# Altium PCB 2.0_LCD_FPC.PcbDoc
Units mil, origin at the board's own origin, x right, y up, seen from the top; angles counter-clockwise.
Board outline 2190 x 1496.06 mil, 2 copper layers (Top Layer, Bottom Layer); 15 components, 23 nets, 85 pads, 94 vias.
Unrouted connection lines stored in the file: 19.
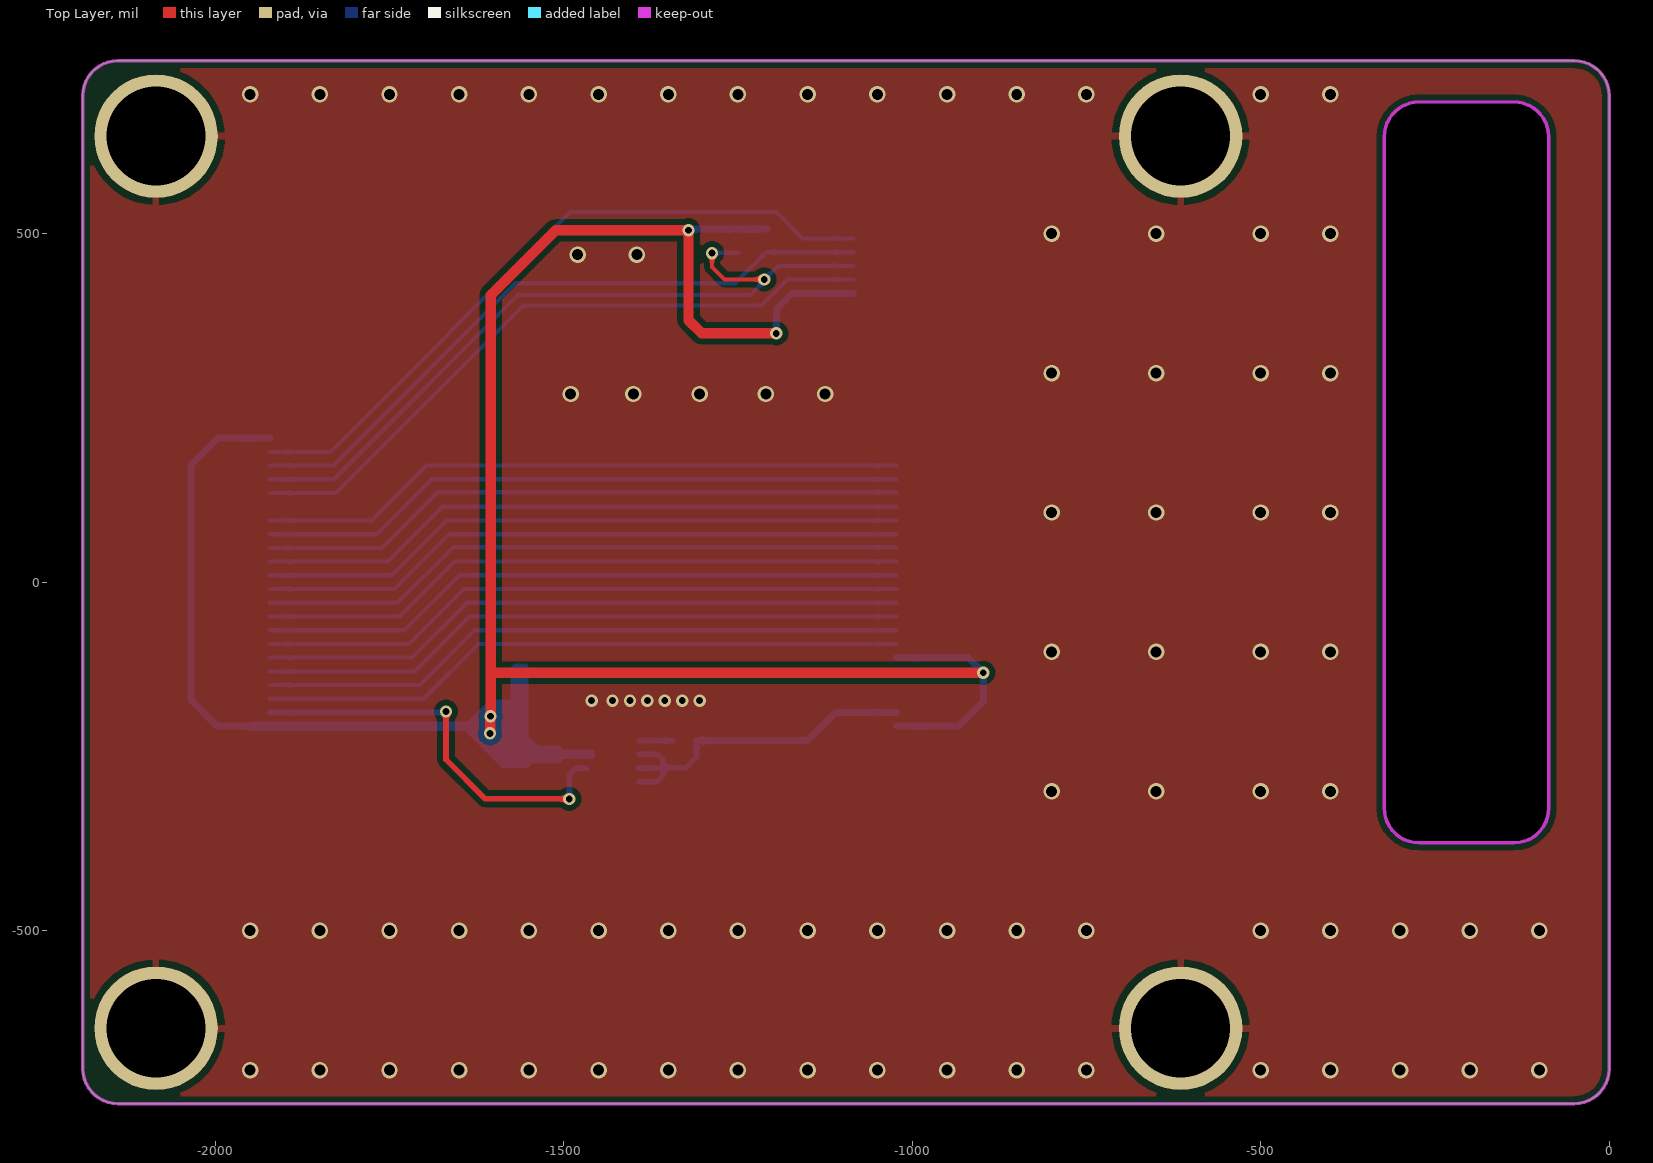
[diagram p0: Top Layer view]
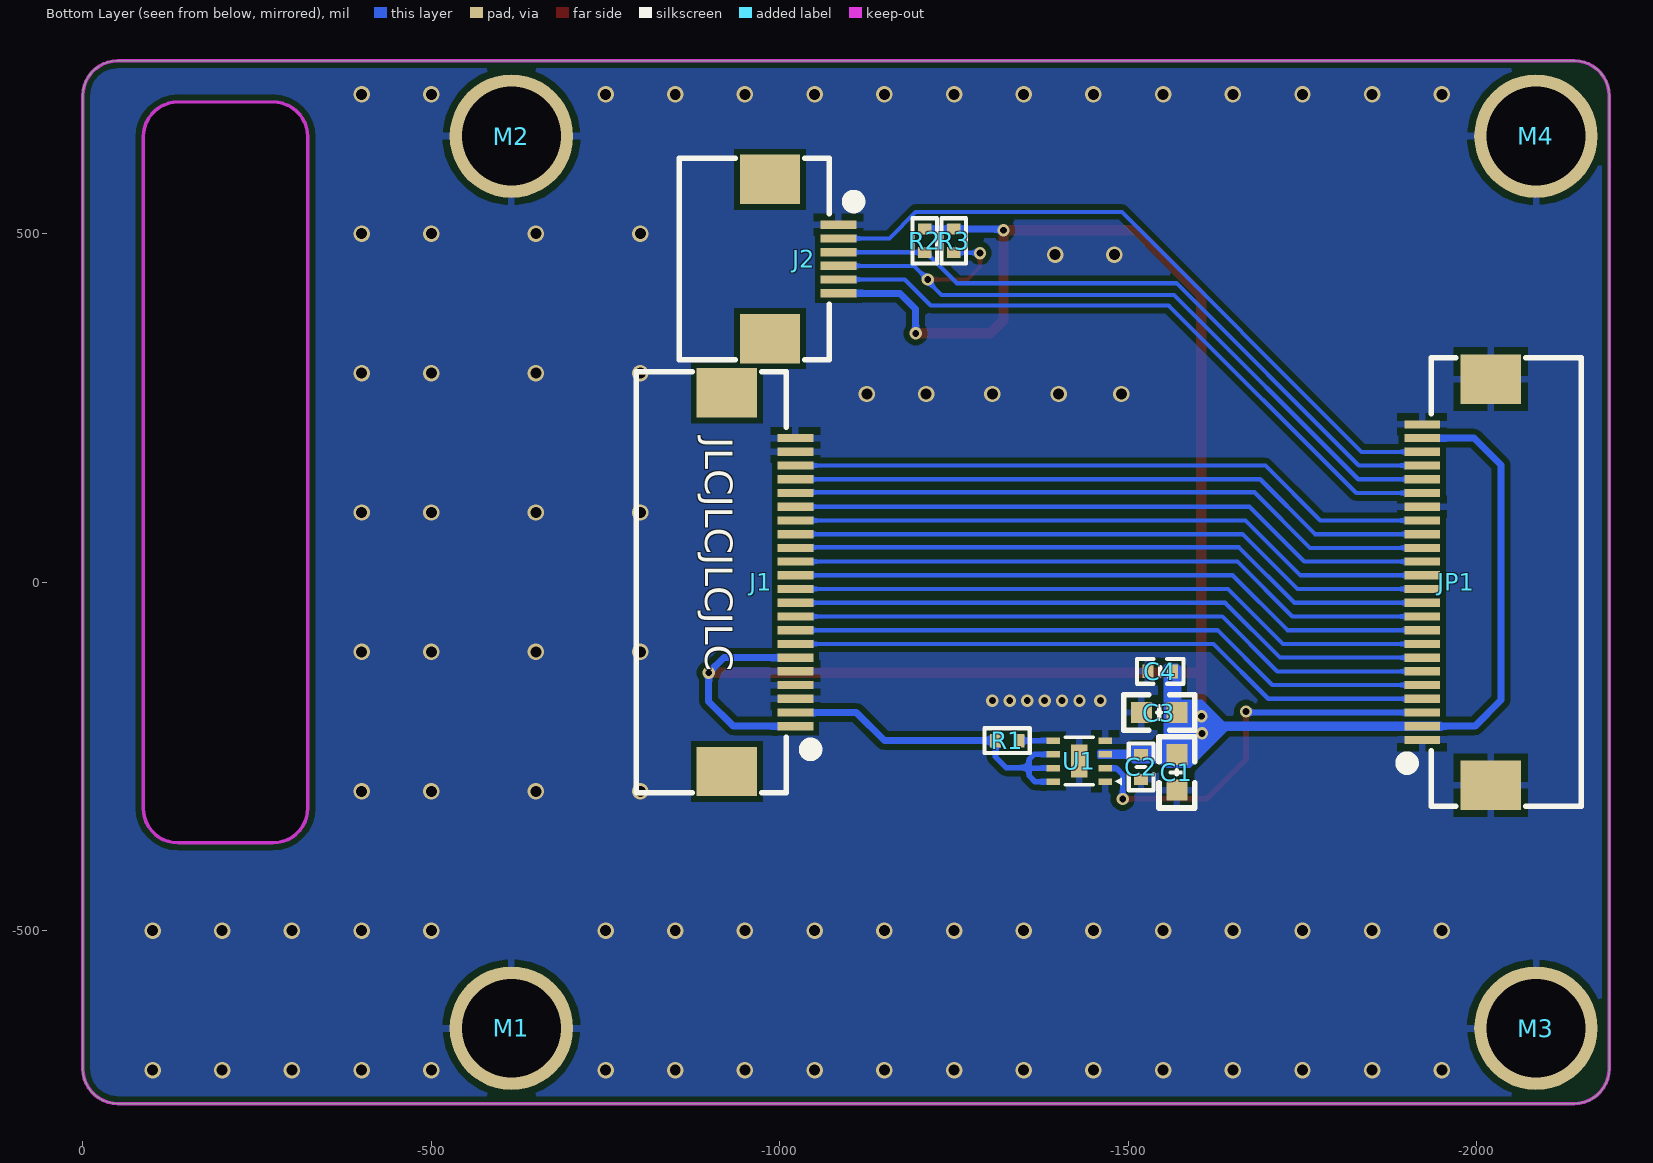
[diagram p1: Bottom Layer view, seen from below]
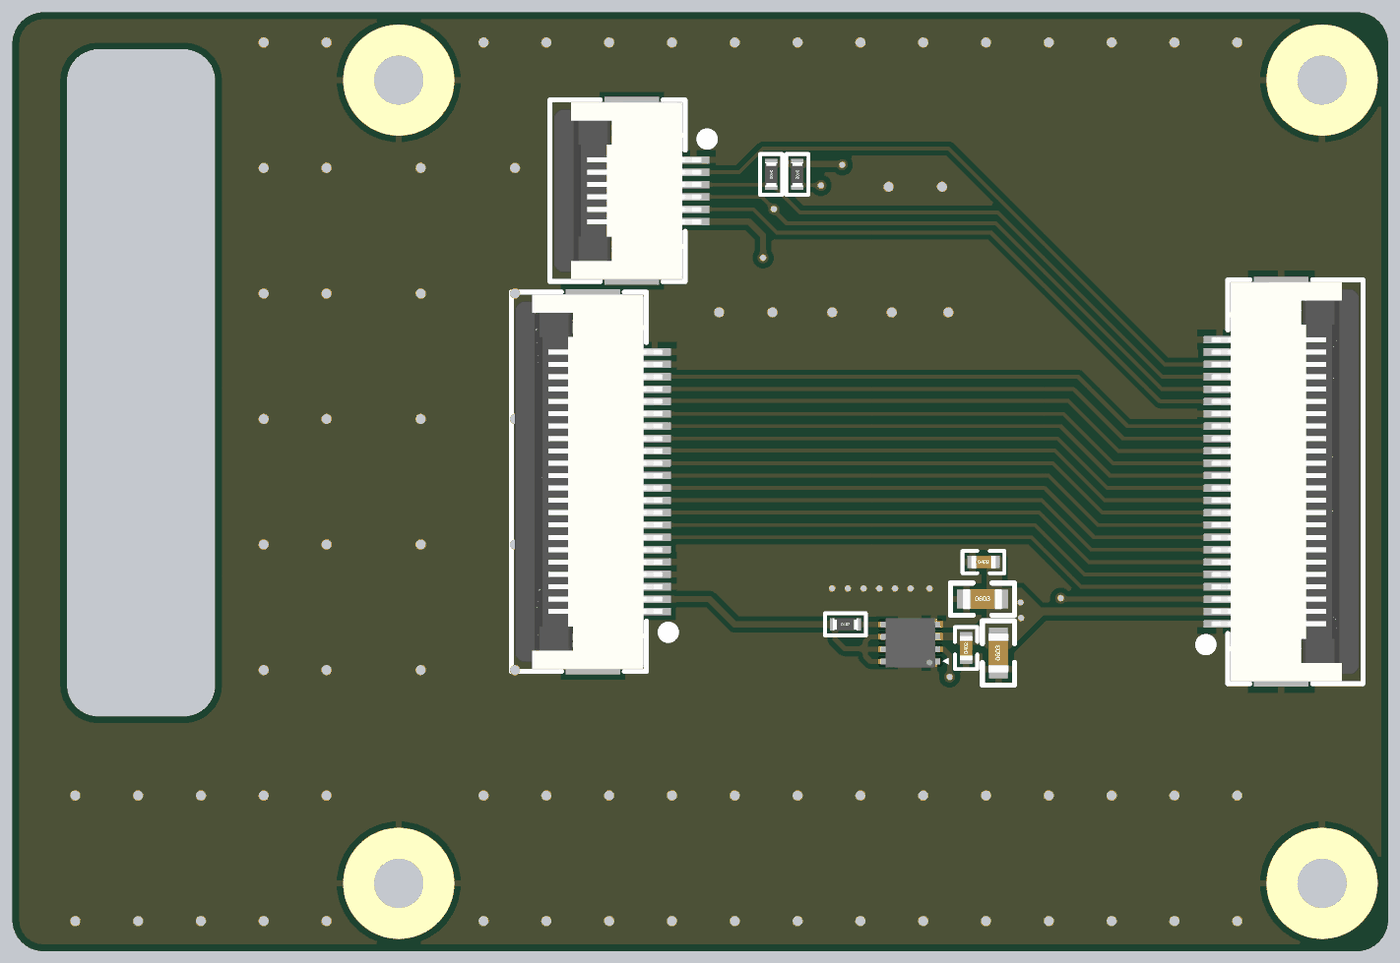
[diagram p2: 3D render of the assembled board from below, using the file's embedded part models]

## Layer stack, top to bottom
Top Solder: solder mask 0.4, Solder Resist, Dk 3.5
Top Layer: signal copper 1.4
Dielectric 1: dielectric 12.6, FR-4, Dk 4.8
Bottom Layer: signal copper 1.4
Bottom Solder: solder mask 0.4, Solder Resist, Dk 3.5

## Board outline
-2190,-698.03 -2190,698.03 cw(c-2140,698.03) -2140,748.03 -50,748.03 cw(c-50,698.03) 0,698.03 0,-698.03 cw(c-50,-698.03) -50,-748.03 -2140,-748.03 cw(c-2140,-698.03)
cut-out: -322.83,-324.02 ccw(c-272.83,-324.02) -272.83,-374.02 -136.61,-374.02 ccw(c-136.61,-324.02) -86.61,-324.02 -86.61,638.98 ccw(c-136.61,638.98) -136.61,688.98 -272.83,688.98 ccw(c-272.83,638.98) -322.83,638.98

## Design rules (kind name [scope] priority, off if disabled: settings)
Clearance Clearance_1 [InPolygon] p1: gap=8 ignorepadtopadclearanceinfootprint=TRUE
Clearance [All] p2: gap=6 ignorepadtopadclearanceinfootprint=FALSE
HoleSize [All] p1: absolutevalues=TRUE maxlimit=500 minlimit=1 maxpercent=80.000 minpercent=20.000
MinimumSolderMaskSliver [All] p1: minsoldermaskwidth=0
PolygonConnect [All] p1: thpad.connectstyle=Relief thpad.reliefconductorwidth=10 thpad.reliefentries=4 thpad.polygonreliefangle="90 Angle" thpad.airgapwidth=10 smdpad.connectstyle=Relief smdpad.reliefconductorwidth=10 smdpad.reliefentries=4 smdpad.polygonreliefangle="90 Angle" smdpad.airgapwidth=10 via.connectstyle=Direct via.reliefconductorwidth=10 via.reliefentries=4 via.polygonreliefangle="90 Angle" via.airgapwidth=10
RoutingVias [All] p1: holewidth=9.84 width=17.72 viastyle="Through Hole" minholewidth=9.84 minwidth=17.72 maxholewidth=23.62 maxwidth=31.5
SilkToSilkClearance [All] p1: silktosilkclearance=0
SilkToSolderMaskClearance [IsPad] p1: minsilkscreentomaskgap=0 clearancetoexposedcopper=TRUE
SolderMaskExpansion [IsVia] p1: expansion=4 istentingtop=TRUE useseparateexpansions=TRUE expansionbottom=4 istentingbottom=TRUE
Width [All] p1: maxlimit=20 minlimit=6 preferedwidth=6
26 further rules are at their usual default settings.

## Components (designator, comment, footprint, x,y, rotation, side; value= is the part's Value field where it differs from the comment)
C1 "4.7uF" C0603_L -1569.66,-272.88 r90 bottom
C2 "0.1uF" C0402_L -1518.29,-265.12 r90 bottom
C3 "4.7uF" C0603_L -1544.41,-187 r180 bottom
C4 "0.1uF" C0402_L -1546,-128 r180 bottom
J1 "0.5mmFPC" FPC0.5-WT-22P -924.14,0 r90 bottom locked
J2 "Touch" FPC0.5-WT-6P -985.88,463.7 r270 bottom locked
JP1 "24Pin" FPC0.5-WT-24P -2020,0 r90 bottom locked
M1 "M2" M2*4.5*2.5*0.8*3.3 -615,-640 r0 bottom
M2 "M2" M2*4.5*2.5*0.8*3.3 -615,640 r0 bottom locked
M3 "M2" M2*4.5*2.5*0.8*3.3 -2085,-640 r0 bottom locked
M4 "M2" M2*4.5*2.5*0.8*3.3 -2085,640 r180 bottom
R1 "NC/0R" R0402_L -1326.21,-227.34 r180 bottom
R2 "4.7K" R0402_L -1208,489.73 r270 bottom
R3 "4.7K" R0402_L -1249.66,489.73 r270 bottom
U1 "AW9364DNR" DFN2X2-8L -1429.6,-256.84 r0 bottom

## Footprints (in the part's own frame and the unit in brackets; to place one, negate y for a bottom-side part, rotate by r counter-clockwise, add the part's x,y. Pads: shape width x height; smd on the part's side, far side on the other; paste and mask are expansions set on the pad)
C0402_L [mm] "无极性贴片电容"
  rect 0.4x0.5 smd: 1(-0.45,0) 2(0.45,0)
  silkscreen extent -0.85,-0.45 0.85,0.45, body extent -0.5,-0.26 0.5,0.26, height 0.54
C0603_L [mil] "无极性贴片电容"
  rect 30x30 smd: 1(-25.59,0) 2(25.59,0)
  silkscreen extent -51,-26 51,26, body extent -31,-16 32,16, height 33
DFN2X2-8L [mm]
  rect 0.5x0.24 smd mask+0.102: 1(-0.95,0.75) 2(-0.95,0.25) 3(-0.95,-0.25) 4(-0.95,-0.75) 5(0.95,-0.75) 6(0.95,-0.25) 7(0.95,0.25) 8(0.95,0.75)
  rect 0.6x1.2 smd mask+0.102: 9(0,0)
  silkscreen extent -1.55,-0.86 0.51,0.88, body extent -1,-1 1,1, height 0.75
FPC0.5-WT-6P [mm] "长：7.2mm，宽：5.2mm，高：2mm               黄晶宝石"
  rect 1.8x2.2 smd: 0(-2.9,0) 0(2.9,0)
  rect 0.3x1.3 smd: 1(-1.25,2.497) 2(-0.75,2.497) 3(-0.25,2.497) 4(0.25,2.497) 5(0.75,2.497) 6(1.25,2.497)
  silkscreen extent -3.67,-3.3 3.67,3.23, body extent -3.6,-3.15 3.6,2.85, height 2
FPC0.5-WT-22P [mm] "长：15.2mm，宽：5.2mm，高：2mm 淘宝ID:黄晶宝石   店铺网址:https://shop463601444.taobao.com"
  rect 1.8x2.2 smd: 0(-6.9,0) 0(6.9,0)
  rect 0.3x1.3 smd: 1(-5.25,-2.497) 2(-4.75,-2.497) 3(-4.25,-2.497) 4(-3.75,-2.497) 5(-3.25,-2.497) 6(-2.75,-2.497) 7(-2.25,-2.497) 8(-1.75,-2.497) 9(-1.25,-2.497) 10(-0.75,-2.497) 11(-0.25,-2.497) 12(0.25,-2.497) 13(0.75,-2.497) 14(1.25,-2.497) 15(1.75,-2.497) 16(2.25,-2.497) 17(2.75,-2.497) 18(3.25,-2.497) 19(3.75,-2.497) 20(4.25,-2.497) 21(4.75,-2.497) 22(5.25,-2.497)
  silkscreen extent -7.68,-3.23 7.68,3.3, body extent -7.6,-2.85 7.6,3.15, height 2
FPC0.5-WT-24P [mm] "长：16.2mm，宽：5.2mm，高：2mm 淘宝ID:黄晶宝石   店铺网址:https://shop463601444.taobao.com"
  rect 1.8x2.2 smd: 0(-7.4,0) 0(7.4,0)
  rect 0.3x1.3 smd: 1(-5.75,2.497) 2(-5.25,2.497) 3(-4.75,2.497) 4(-4.25,2.497) 5(-3.75,2.497) 6(-3.25,2.497) 7(-2.75,2.497) 8(-2.25,2.497) 9(-1.75,2.497) 10(-1.25,2.497) 11(-0.75,2.497) 12(-0.25,2.497) 13(0.25,2.497) 14(0.75,2.497) 15(1.25,2.497) 16(1.75,2.497) 17(2.25,2.497) 18(2.75,2.497) 19(3.25,2.497) 20(3.75,2.497) 21(4.25,2.497) 22(4.75,2.497) 23(5.25,2.497) 24(5.75,2.497)
  silkscreen extent -8.18,-3.3 8.18,3.23, body extent -8.1,-3.15 8.1,2.85, height 2
M2*4.5*2.5*0.8*3.3 [mm] "SMT螺母"
  round 4.5 hole 3.6: 1(0,0)
  body extent -2.25,-2.25 2.25,2.25, height 2.5
R0402_L [mm] "1/16W贴片电阻"
  rect 0.4x0.5 smd: 1(-0.425,0) 2(0.425,0)
  silkscreen extent -0.82,-0.45 0.83,0.45, body extent -0.5,-0.25 0.5,0.25, height 0.3

## Part data
C1 C2 C3 C4: library part C, "贴片电容", BOM名称=无极性贴片电容, 联系卖家，免费查找封装=唯一出售店铺网址https://shop463601444.taobao.com
J1: library part 中景园2.0寸屏幕FPC接口
J2: library part 深圳市大显伟业2.0寸触摸屏
JP1: library part 屏幕板FPC, "屏幕板外接座"
M1 M2 M3 M4: library part M2系列, "M2孔支撑柱"
R1 R2 R3: library part R, "贴片电阻", BOM名称=贴片电阻, 联系卖家，免费查找封装=唯一出售店铺网址https://shop463601444.taobao.com
U1: "并联调光背光驱动"

## Via types
v1: diameter 23.62, hole 15.75, Top Layer to Bottom Layer, tented both sides, 78 vias
v2: diameter 17.72, hole 9.84, Top Layer to Bottom Layer, tented both sides, 16 vias

## Nets (pads, with @x,y where several pads share a name; then routed paths per layer and width w, separated by ;. In a path a pad name is that pad's centre, name@x,y a point inside that pad or via, vN(x,y) a via of type N, cw(c..) or ccw(c..) an arc to the next point about the centre after c; other vN are vias at no path point)
CS: J1.18 JP1.15 | length 932.7
  Bottom Layer w6: JP1.15 -1760.79,49.21 -1681,129 -1023.5,129 J1.18
DB0: J1.14 JP1.11 | length 932.5
  Bottom Layer w6: JP1.11 -1738.52,-29.53 -1658.99,50 -1023.24,50 J1.14
DB1: J1.13 JP1.10 | length 931.9
  Bottom Layer w6: JP1.10 -1735.3,-49.21 -1656.56,29.53 J1.13
DB2: J1.12 JP1.9 | length 931.9
  Bottom Layer w6: JP1.9 -1728.61,-68.9 -1649.87,9.84 J1.12
DB3: J1.11 JP1.8 | length 931.9
  Bottom Layer w6: JP1.8 -1721.91,-88.58 -1643.17,-9.84 J1.11
DB4: J1.10 JP1.7 | length 931.9
  Bottom Layer w6: JP1.7 -1717.79,-108.27 -1639.05,-29.53 J1.10
DB5: J1.9 JP1.6 | length 931.9
  Bottom Layer w6: JP1.6 -1713.71,-127.95 -1634.97,-49.21 J1.9
DB6: J1.8 JP1.5 | length 931.9
  Bottom Layer w6: JP1.5 -1706.63,-147.64 -1627.89,-68.9 J1.8
DB7: J1.7 JP1.4 | length 931.9
  Bottom Layer w6: JP1.4 -1700.89,-167.32 -1622.15,-88.58 J1.7
GND: C1.1 C2.1 C3.1 C4.1 J1.3 J1.4 J1.5 J1.21 J1.22 J2.1 JP1.0 JP1.1 JP1.18 JP1.24 M1.1 M2.1 M3.1 M4.1 U1.1 U1.4 U1.9
  other v1: -1950,-700 -1850,-700 -1750,-700 -1650,-700 -1550,-700 -1450,-700 -1350,-700 -1250,-700 -1150,-700 -1050,-700 -950,-700 -850,-700 -750,-700 -500,-700 -400,-700 -300,-700 -200,-700 -100,-700 -1950,-500 -1850,-500 -1750,-500 -1650,-500 -1550,-500 -1450,-500 -1350,-500 -1250,-500 -1150,-500 -1050,-500 -950,-500 -850,-500 -750,-500 -500,-500 -400,-500 -300,-500 -200,-500 -100,-500 -800,-300 -650,-300 -500,-300 -400,-300 -800,-100 -650,-100 -500,-100 -400,-100 -800,100 -650,100 -500,100 -400,100 -1490,270 -1400,270 -1305,270 -1210,270 -1125,270 -800,300 -650,300 -500,300 -400,300 -1480,470 -1395,470 -800,500 -650,500 -500,500 -400,500 -1950,700 -1850,700 -1750,700 -1650,700 -1550,700 -1450,700 -1350,700 -1250,700 -1150,700 -1050,700 -950,700 -850,700 -750,700 -500,700 -400,700
  other v2: -1460,-170 -1430,-170 -1405,-170 -1380,-170 -1355,-170 -1330,-170 -1305,-170
LCD_BL: JP1.3 U1.2 | length 586.6
  Top Layer w8: v2(-1668.94,-185.56) -1668.94,-254.69 -1612.63,-311 v2(-1492,-311)
  Bottom Layer w8: JP1.3 -1670.38,-187.01 v2(-1668.94,-185.56) ; v2(-1492,-311) -1492,-276 -1483,-267 -1467.32,-267 U1.2
NetR1_2: R1.2 U1.5 | length 49.3
  Bottom Layer w8: U1.5 R1.2@-1342.96,-227.33
RD: J1.15 JP1.12 | length 931.9
  Bottom Layer w6: JP1.12 -1742.66,-9.84 -1663.92,68.9 J1.15
RES: J1.20 JP1.17 | length 931.9
  Bottom Layer w6: JP1.17 -1775.53,88.58 -1696.79,167.32 J1.20
RS: J1.17 JP1.14 | length 931.9
  Bottom Layer w6: JP1.14 -1752.47,29.53 -1673.73,108.27 J1.17
TE: J1.19 JP1.16 | length 931.9
  Bottom Layer w6: JP1.16 -1768.1,68.9 -1689.36,147.64 J1.19
Touch_INT: J2.5 JP1.19 | length 964.3
  Bottom Layer w6: JP1.19 -1827.05,127.95 -1558,397 -1216.53,397 -1179.35,434.17 J2.5
Touch_RST: J2.2 JP1.22 | length 995.6
  Bottom Layer w6: JP1.22 -1834.83,187.01 -1490.84,531 -1195,531 -1157.23,493.23 J2.2
Touch_SCL: J2.4 JP1.20 R3.2 | length 1105.9
  Top Layer w6: v2(-1287.18,472.2) -1287.18,452.27 -1269.31,434.39 v2(-1212.24,434.39)
  Bottom Layer w6: JP1.20 -1830,147.64 -1565.64,412 -1232.17,412 -1212.24,431.93 v2(-1212.24,434.39) -1192.77,453.86 J2.4 ; v2(-1287.18,472.2) -1286.78,472.6 -1250.06,472.6 R3.2
Touch_SDA: J2.3 JP1.21 R2.2 | length 964.3
  Bottom Layer w6: JP1.21 -1830.68,167.32 -1569,429 -1253.97,429 -1209.97,473 R2.2 -1207.73,473.27 -1084.46,473.27 J2.3
VCC_3V3: C1.2 C2.2 C3.2 C4.2 J1.1 J1.6 J2.6 JP1.2 JP1.23 R2.1 R3.1 U1.3 | length 3099.7
  Top Layer w15: v2(-1605.86,-217) -1605.45,-216.59 -1605.45,-192.68 v2(-1605.03,-192.27) -1605.03,-131 ; v2(-1195,357) -1302,357 -1321,376 v2(-1321,505) -1511.75,505 -1605.03,411.71 -1605.03,-131 ; v2(-898,-130) -1604.03,-130 -1605.03,-131
  Bottom Layer w10: JP1.2 -1997.31,-206.69 -2035,-169 -2035,168 -1996.31,206.69 JP1.23 ; v2(-1321,505) -1319.54,506.46 R3.1 R2.1 ; v2(-1195,357) -1195,392 -1172.51,414.49 J2.6 ; J1.1 -933.69,-206.69 -898,-171 v2(-898,-130) -919.73,-108.27 J1.6
VLED_K: J1.2 R1.1 U1.6 U1.7 U1.8 | length 515.2
  Bottom Layer w8: U1.8 -1366.37,-286.37 -1358,-278 -1358,-266 ; U1.7 -1358.69,-266.69 -1358,-266 ; U1.6 -1365,-247 -1358,-254 -1358,-266 ; R1.1 -1309.48,-250.74 -1324.74,-266 -1358,-266
  Bottom Layer w10: R1.1 -1150.04,-227.34 -1109.71,-187.01 J1.2
WR: J1.16 JP1.13 | length 931.9
  Bottom Layer w6: JP1.13 -1747.16,9.84 -1668.42,88.58 J1.16
pads on no net: J1.0 J2.0

## Polygon pours and split planes (outlines as drawn)
GND on Bottom Layer "GND_L02_P000" (solid, remove dead copper, pour order 0): -2190,750 -2190,-750 0,-750 0,750
GND on Top Layer "GND_L01_P001" (solid, remove dead copper, pour order 1): -2190,750 -2190,-750 0,-750 0,750

## Keep-outs
Keep-Out Layer:
  lines w5: -2190,-698.03 ccw(c-2140,-698.03) -2140,-748.03 -50,-748.03 ccw(c-50,-698.03) 0,-698.03 0,698.03 ccw(c-50,698.03) -50,748.03 -260,748.03 -2140,748.03 ccw(c-2140,698.03) -2190,698.03 -2190,-698.03 ; -322.83,-324.02 ccw(c-272.83,-324.02) -272.83,-374.02 -136.61,-374.02 ccw(c-136.61,-324.02) -86.61,-324.02 -86.61,0 -86.61,638.98 ccw(c-136.61,638.98) -136.61,688.98 -272.83,688.98 ccw(c-272.83,638.98) -322.83,638.98 -322.83,-324.02

## Other copper
Bottom Layer:
  region net VCC_3V3: -1502.68,-250.59 -1500.17,-253.1 -1457.08,-253.1 -1455.32,-251.34 -1455.32,-242.68 -1457.43,-240.57 -1500.04,-240.57 -1499.89,-240.56 -1502.68,-243.35
  region net VCC_3V3: -1576,-170 -1576,-122 -1571,-117 -1553.67,-117 -1551,-119.67 -1551,-172.54 -1556.37,-177.91 -1568.09,-177.91
  region net VCC_3V3: -1950.23,-213.04 -1952.02,-211.25 -1952,-211.31 -1952,-203 -1949.42,-200.42 -1637.93,-200.42 -1606.48,-168.97 -1554.67,-168.97 -1550.73,-172.91 -1550.73,-221.06 -1536.92,-234.88 -1505.74,-234.88 -1500.04,-240.57 -1500.04,-253.22 -1506.32,-259.49 -1544.45,-259.49 -1551.01,-266.06 -1589.05,-266.06 -1642.06,-213.04

## Silkscreen, mask and mechanical layers (free items; w line width, h text height)
Bottom Overlay:
  text "JLCJLCJLCJLC" at -893.01,208.1 h40 r90
Mechanical 1:
  lines w5: -2190,-698.03 ccw(c-2140,-698.03) -2140,-748.03 -50,-748.03 ccw(c-50,-698.03) 0,-698.03 0,698.03 ccw(c-50,698.03) -50,748.03 -260,748.03 -2140,748.03 ccw(c-2140,698.03) -2190,698.03 -2190,-698.03 ; -322.83,-324.02 ccw(c-272.83,-324.02) -272.83,-374.02 -136.61,-374.02 ccw(c-136.61,-324.02) -86.61,-324.02 -86.61,0 -86.61,638.98 ccw(c-136.61,638.98) -136.61,688.98 -272.83,688.98 ccw(c-272.83,638.98) -322.83,638.98 -322.83,-324.02